# Altium PCB CHILD_BOARD_revA.PcbDoc (part 1 of 2)
Units mil, origin at the board's own origin, x right, y up, seen from the top; angles counter-clockwise.
Board outline 6000 x 4000 mil, 2 copper layers (Top Layer, Bottom Layer); 300 components, 212 nets, 880 pads, 8 vias.
Unrouted connection lines stored in the file: 627.
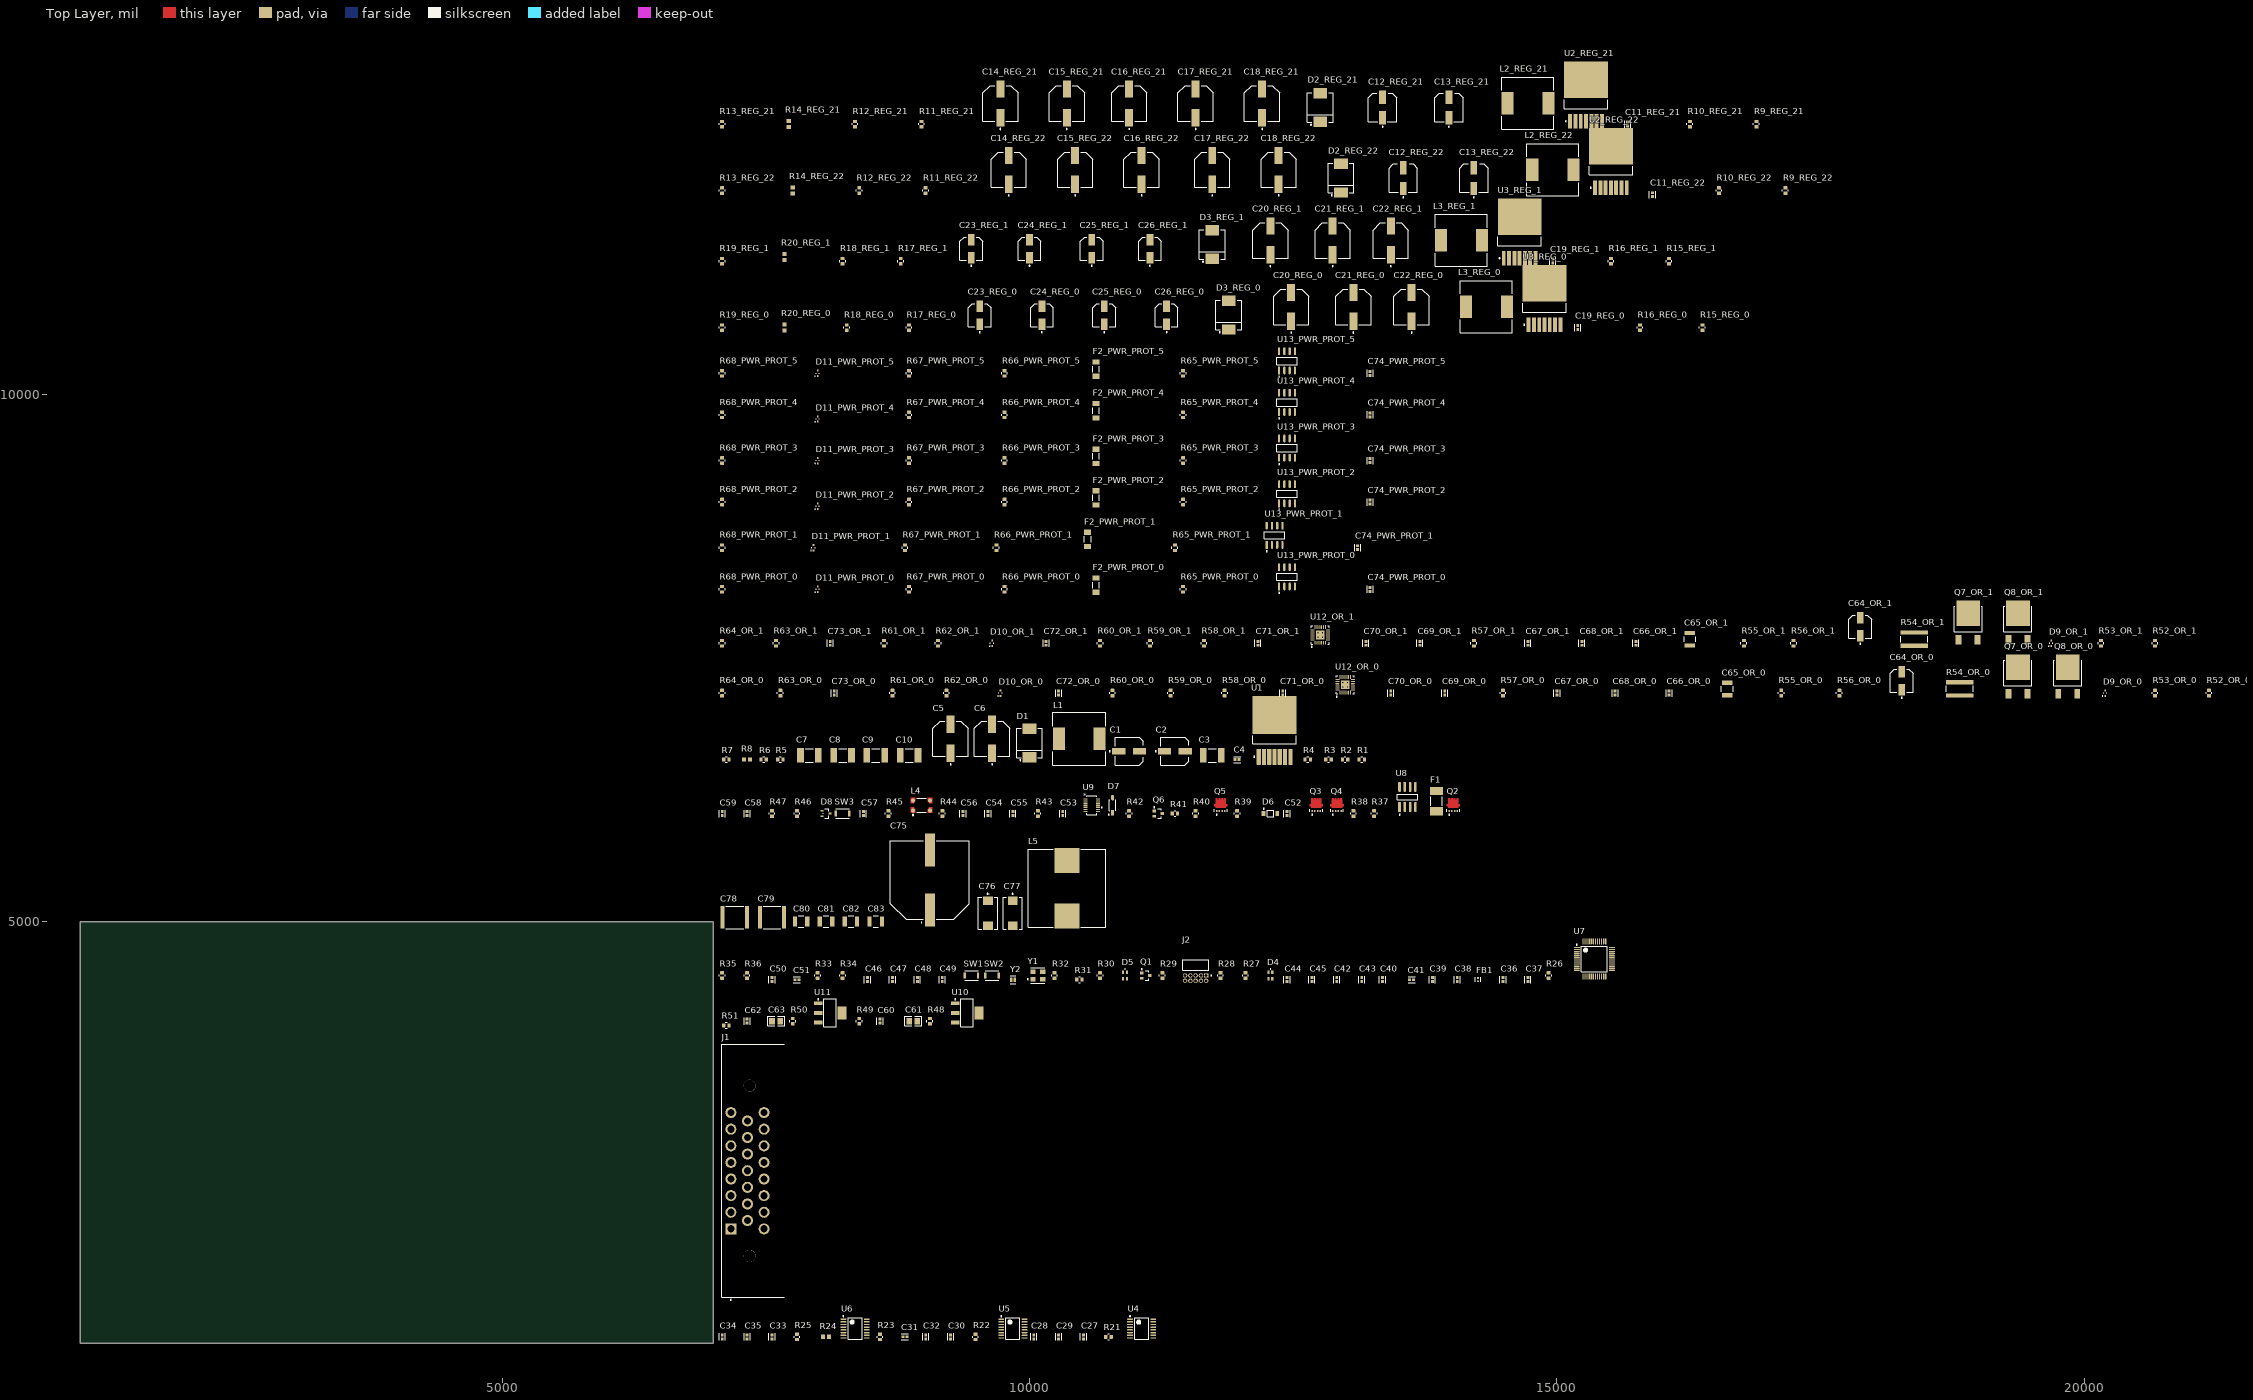
[diagram p0: Top Layer view]
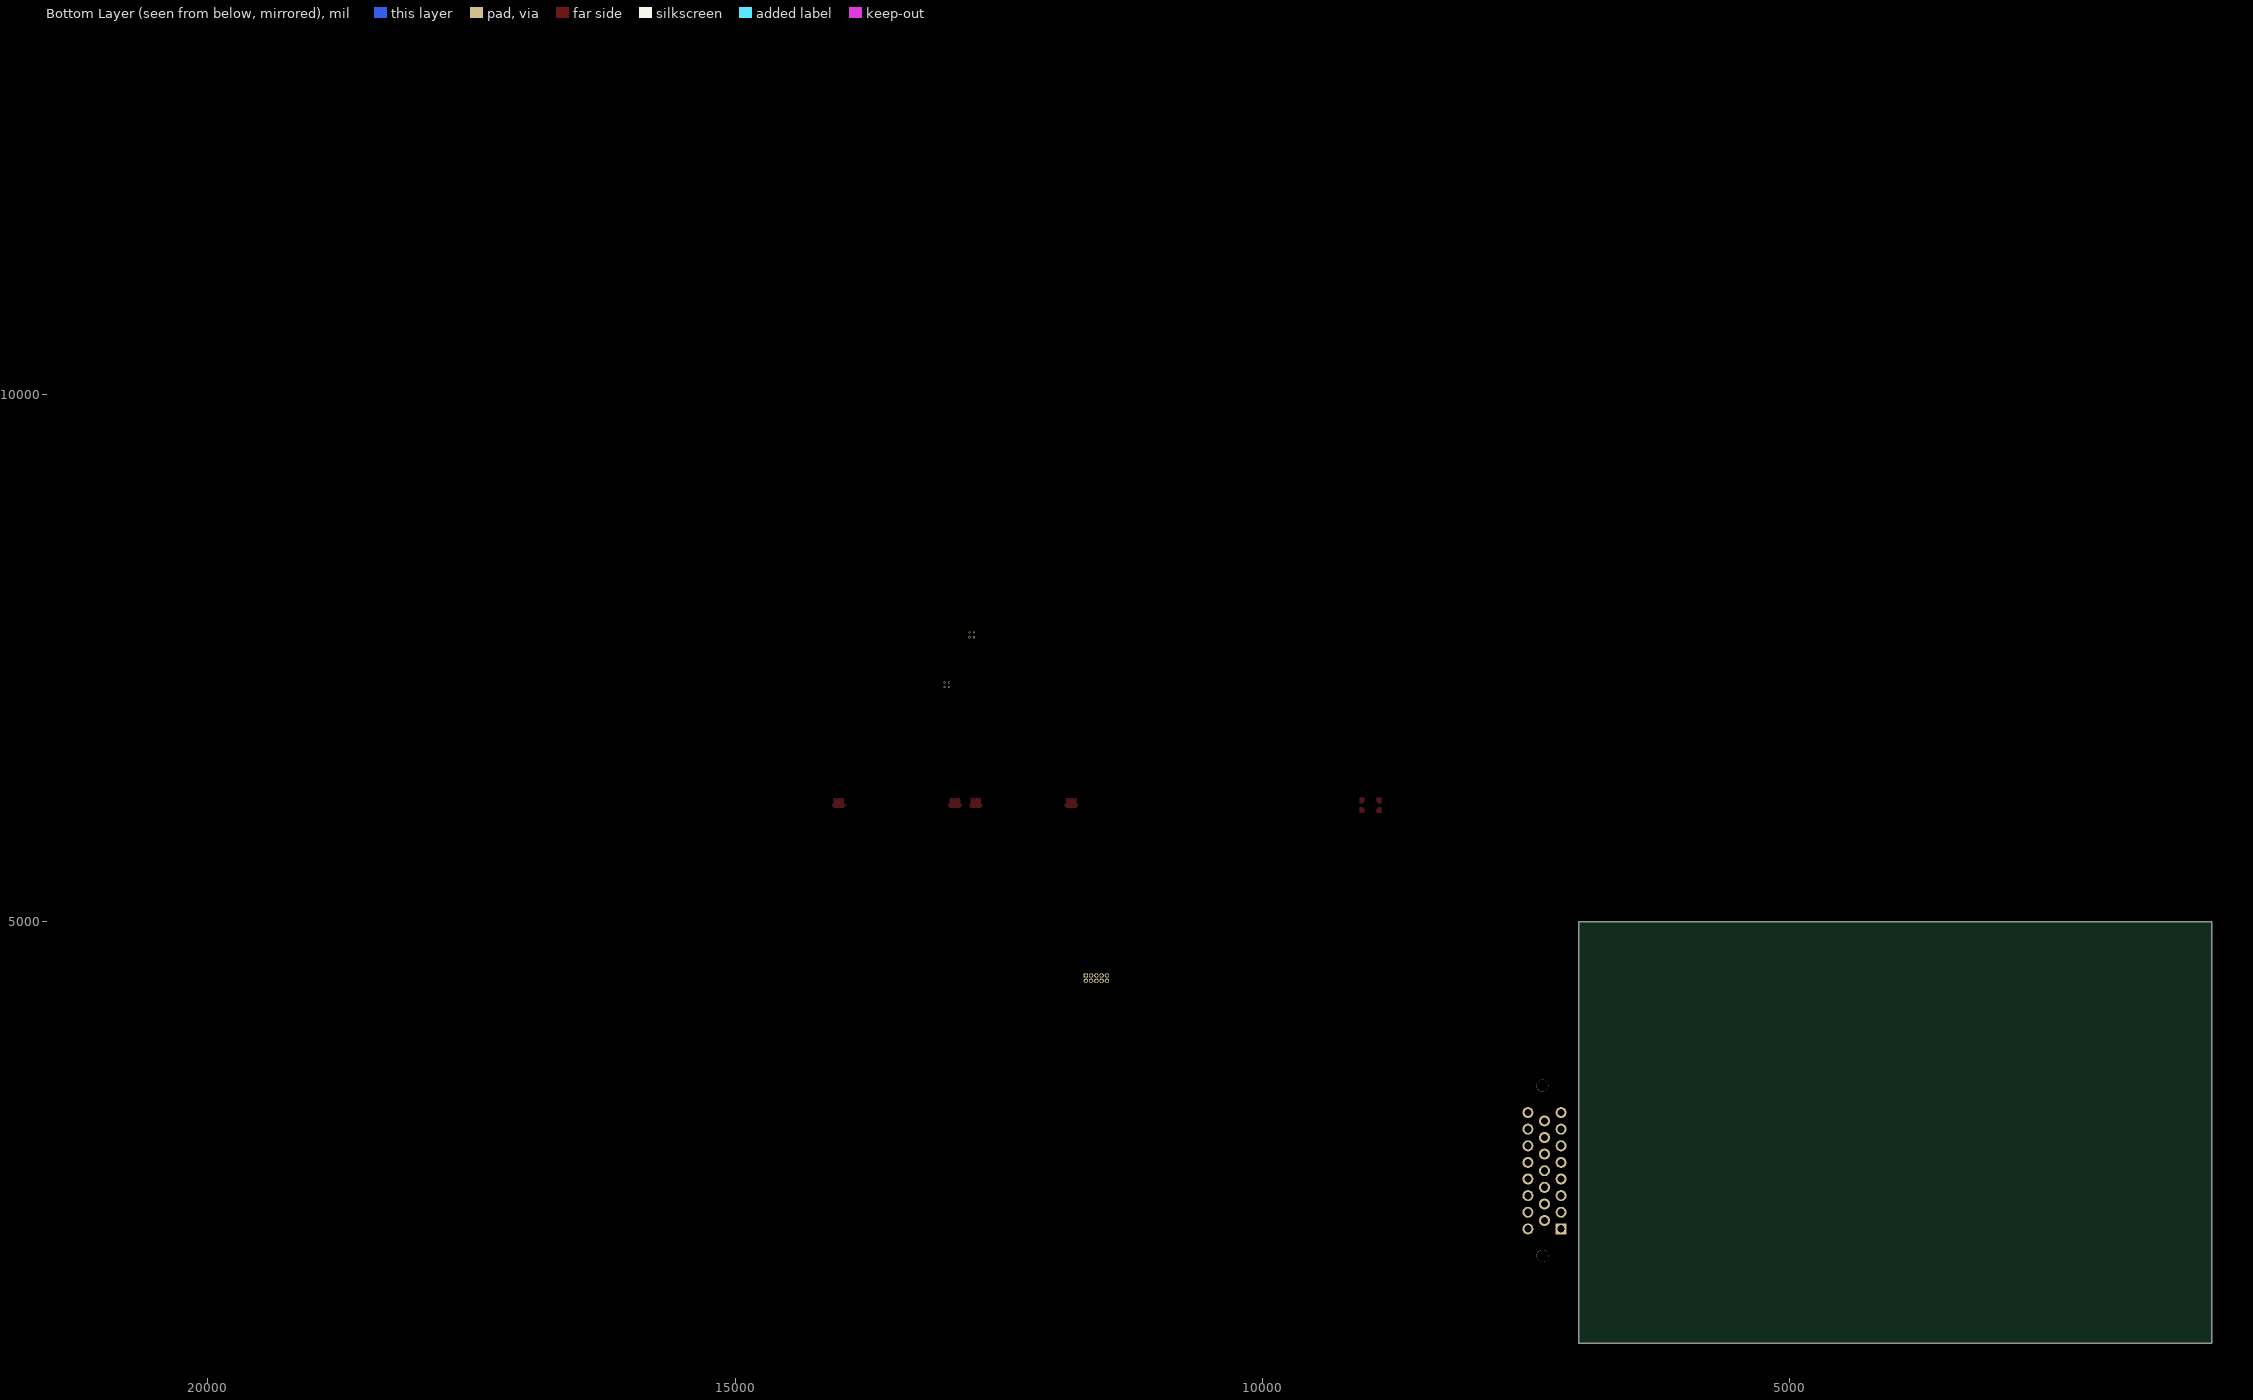
[diagram p1: Bottom Layer view, seen from below]

## Layer stack, top to bottom
Top Solder: solder mask 0.4, Solder Resist, Dk 3.5
Top Layer: signal copper 1.4
Dielectric 1: dielectric 12.6, FR-4, Dk 4.8
Bottom Layer: signal copper 1.4
Bottom Solder: solder mask 0.4, Solder Resist, Dk 3.5

## Board outline
1000,1000 7000,1000 7000,5000 1000,5000

## Design rules (kind name [scope] priority, off if disabled: settings)
Clearance [All] p1: gap=10 ignorepadtopadclearanceinfootprint=FALSE
DiffPairsRouting [All] p1: maxlimit=10 minlimit=10 mostfreqgap=10 toplayer_minwidth=15 toplayer_maxwidth=15 toplayer_prefwidth=15 bottomlayer_minwidth=15 bottomlayer_maxwidth=15 bottomlayer_prefwidth=15 maxuncoupledlength=500
PolygonConnect [All] p1: connectstyle=Relief reliefconductorwidth=10 reliefentries=4 polygonreliefangle="90 Angle" airgapwidth=10
RoutingVias [All] p1: holewidth=28 width=50 viastyle="Through Hole" minholewidth=28 minwidth=50 maxholewidth=28 maxwidth=50
SolderMaskExpansion [All] p1: expansion=4 istentingtop=FALSE
SupplyNets "Schematic Supply Nets_15" [InNet('5V_REG_FB_REG_1')] p1: voltage=0.000
SupplyNets "Schematic Supply Nets_14" [InNet('5V_REG_FB_REG_0')] p2: voltage=0.000
SupplyNets "Schematic Supply Nets_13" [InNet('3V3_INT')] p3: voltage=0.000
SupplyNets "Schematic Supply Nets_12" [InNet('INT_3V3')] p4: voltage=0.000
SupplyNets "Schematic Supply Nets_11" [InNet('3V3_AUX_FB_REG_21')] p5: voltage=0.000
SupplyNets "Schematic Supply Nets_10" [InNet('APM_VCC')] p6: voltage=0.000
SupplyNets "Schematic Supply Nets_9" [InNet('CAR_VCC')] p7: voltage=0.000
SupplyNets "Schematic Supply Nets_8" [InNet('JETSON_VCC')] p8: voltage=0.000
SupplyNets "Schematic Supply Nets_7" [InNet('INT_5V')] p9: voltage=0.000
SupplyNets "Schematic Supply Nets_6" [InNet('2V_AUX_OUT')] p10: voltage=0.000
SupplyNets "Schematic Supply Nets_5" [InNet('PWR_OUT')] p11: voltage=0.000
SupplyNets "Schematic Supply Nets_4" [InNet('3V3_AUX_FB_REG_22')] p12: voltage=0.000
SupplyNets "Schematic Supply Nets_3" [InNet('5V0_INT')] p13: voltage=0.000
SupplyNets "Schematic Supply Nets_2" [InNet('VCC')] p14: voltage=0.000
SupplyNets "Schematic Supply Nets_1" [InNet('GND')] p15: voltage=0.000
SupplyNets "Schematic Supply Nets" [InNet('3V3')] p16: voltage=0.000
Width [All] p1: maxlimit=10 minlimit=10 preferedwidth=10
29 further rules are at their usual default settings.

## Classes and differential pairs
channel class PWR_PROT_AND_VI_SENSE: PWR_PROT_0 PWR_PROT_1 PWR_PROT_2 PWR_PROT_3 PWR_PROT_4 PWR_PROT_5
channel class LM74910H_PINOUT: OR_0 OR_1
channel class 3V3_REG: REG_21 REG_22
component class REG_22: C11_REG_22 C12_REG_22 C13_REG_22 C14_REG_22 C15_REG_22 C16_REG_22 C17_REG_22 C18_REG_22 D2_REG_22 L2_REG_22 R9_REG_22 R10_REG_22 R11_REG_22 R12_REG_22 R13_REG_22 R14_REG_22 U2_REG_22
component class REG_21: C11_REG_21 C12_REG_21 C13_REG_21 C14_REG_21 C15_REG_21 C16_REG_21 C17_REG_21 C18_REG_21 D2_REG_21 L2_REG_21 R9_REG_21 R10_REG_21 R11_REG_21 R12_REG_21 R13_REG_21 R14_REG_21 U2_REG_21
component class PWR_PROT_5: C74_PWR_PROT_5 D11_PWR_PROT_5 F2_PWR_PROT_5 R65_PWR_PROT_5 R66_PWR_PROT_5 R67_PWR_PROT_5 R68_PWR_PROT_5 U13_PWR_PROT_5
component class PWR_PROT_4: C74_PWR_PROT_4 D11_PWR_PROT_4 F2_PWR_PROT_4 R65_PWR_PROT_4 R66_PWR_PROT_4 R67_PWR_PROT_4 R68_PWR_PROT_4 U13_PWR_PROT_4
component class PWR_PROT_3: C74_PWR_PROT_3 D11_PWR_PROT_3 F2_PWR_PROT_3 R65_PWR_PROT_3 R66_PWR_PROT_3 R67_PWR_PROT_3 R68_PWR_PROT_3 U13_PWR_PROT_3
component class PWR_PROT_2: C74_PWR_PROT_2 D11_PWR_PROT_2 F2_PWR_PROT_2 R65_PWR_PROT_2 R66_PWR_PROT_2 R67_PWR_PROT_2 R68_PWR_PROT_2 U13_PWR_PROT_2
component class PWR_PROT_1: C74_PWR_PROT_1 D11_PWR_PROT_1 F2_PWR_PROT_1 R65_PWR_PROT_1 R66_PWR_PROT_1 R67_PWR_PROT_1 R68_PWR_PROT_1 U13_PWR_PROT_1
component class PWR_PROT_0: C74_PWR_PROT_0 D11_PWR_PROT_0 F2_PWR_PROT_0 R65_PWR_PROT_0 R66_PWR_PROT_0 R67_PWR_PROT_0 R68_PWR_PROT_0 U13_PWR_PROT_0
component class PWR_FILTER_0: C75 C76 C77 C78 C79 C80 C81 C82 C83 L5
component class OR_1: C64_OR_1 C65_OR_1 C66_OR_1 C67_OR_1 C68_OR_1 C69_OR_1 C70_OR_1 C71_OR_1 C72_OR_1 C73_OR_1 D9_OR_1 D10_OR_1 Q7_OR_1 Q8_OR_1 R52_OR_1 R53_OR_1 R54_OR_1 R55_OR_1 R56_OR_1 R57_OR_1 R58_OR_1 R59_OR_1 R60_OR_1 R61_OR_1 R62_OR_1 R63_OR_1 R64_OR_1 U12_OR_1
component class OR_0: C64_OR_0 C65_OR_0 C66_OR_0 C67_OR_0 C68_OR_0 C69_OR_0 C70_OR_0 C71_OR_0 C72_OR_0 C73_OR_0 D9_OR_0 D10_OR_0 Q7_OR_0 Q8_OR_0 R52_OR_0 R53_OR_0 R54_OR_0 R55_OR_0 R56_OR_0 R57_OR_0 R58_OR_0 R59_OR_0 R60_OR_0 R61_OR_0 R62_OR_0 R63_OR_0 R64_OR_0 U12_OR_0
channel class 5V_REG: REG_0 REG_1
net class PWR: 2V_AUX_OUT 3V3_AUX_FB_REG_21 3V3_AUX_FB_REG_22 5V_REG_FB_REG_0 5V_REG_FB_REG_1 NetC4_2 NetC11_REG_21_2 NetC11_REG_22_2 NetC19_REG_0_2 NetC19_REG_1_2 PWR_IN PWR_IN_REG_0 PWR_IN_REG_1 PWR_IN_REG_21 PWR_IN_REG_22
net class 120DIFF: CAN_N CAN_P PRE_CAN_N PRE_CAN_P TERM_CAP
component class REG_3: C1 C2 C3 C4 C5 C6 C7 C8 C9 C10 D1 L1 R1 R2 R3 R4 R5 R6 R7 R8 U1
component class REG_1: C19_REG_1 C20_REG_1 C21_REG_1 C22_REG_1 C23_REG_1 C24_REG_1 C25_REG_1 C26_REG_1 D3_REG_1 L3_REG_1 R15_REG_1 R16_REG_1 R17_REG_1 R18_REG_1 R19_REG_1 R20_REG_1 U3_REG_1
component class REG_0: C19_REG_0 C20_REG_0 C21_REG_0 C22_REG_0 C23_REG_0 C24_REG_0 C25_REG_0 C26_REG_0 D3_REG_0 L3_REG_0 R15_REG_0 R16_REG_0 R17_REG_0 R18_REG_0 R19_REG_0 R20_REG_0 U3_REG_0
component class PWR_MGMT: C52 C53 C54 C55 C56 C57 C58 C59 D6 D7 D8 F1 L4 Q2 Q3 Q4 Q5 Q6 R37 R38 R39 R40 R41 R42 R43 R44 R45 R46 R47 SW3 U8 U9
component class INT_REG_0: C60 C61 C62 C63 R48 R49 R50 R51 U10 U11
component class MCU_0: C36 C37 C38 C39 C40 C41 C42 C43 C44 C45 C46 C47 C48 C49 C50 C51 D4 D5 FB1 J2 Q1 R26 R27 R28 R29 R30 R31 R32 R33 R34 R35 R36 SW1 SW2 U7 Y1 Y2
component class CHILD_BOARD: J1
component class ADC_0: C27 C28 C29 C30 C31 C32 C33 C34 C35 R21 R22 R23 R24 R25 U4 U5 U6
differential pair X: +X_P -X_N
differential pair X32: +X32_P -X32_N
differential pair PRE_CAN: +PRE_CAN_P -PRE_CAN_N

## Components (designator, comment, footprint, x,y, rotation, side; value= is the part's Value field where it differs from the comment)
C1 "EEHZA1V680XP" FP-EEH-D8-MFG 10944.89,6614.18 r0 top
C2 "EEHZA1V680XP" FP-EEH-D8-MFG 11377.96,6614.18 r0 top
C3 "CAP 470nF 50V 1812(4532)" CAPC1812(4532)125_M 11732.29,6574.81 r0 top value=470nF
C4 "10n" FP-0402-L_1_0_0_05-W_0_5-IPC_A 11968.51,6535.44 r0 top
C5 "16SVPC120M" FP-OS-CON-SMT-E7-MFG 9251.97,6732.29 r90 top
C6 "16SVPC120M" FP-OS-CON-SMT-E7-MFG 9645.67,6732.29 r90 top
C7 "CAP 470nF 50V 1812(4532)" CAPC1812(4532)125_M 7913.39,6574.81 r0 top value=470nF
C8 "CAP 470nF 50V 1812(4532)" CAPC1812(4532)125_M 8228.35,6574.81 r0 top value=470nF
C9 "CAP 470nF 50V 1812(4532)" CAPC1812(4532)125_M 8543.31,6574.81 r0 top value=470nF
C10 "CAP 470nF 50V 1812(4532)" CAPC1812(4532)125_M 8858.27,6574.81 r0 top value=470nF
C11_REG_21 "10n" FP-0402-L_1_0_0_05-W_0_5-IPC_A 15669.3,12559.06 r90 top (schematic designator C11)
C11_REG_22 "10n" FP-0402-L_1_0_0_05-W_0_5-IPC_A 15905.52,11889.77 r90 top (schematic designator C11)
C12_REG_21 "EEHZA1V680XP" FP-EEH-D8-MFG 13346.46,12716.54 r90 top (schematic designator C12)
C12_REG_22 "EEHZA1V680XP" FP-EEH-D8-MFG 13543.31,12047.25 r90 top (schematic designator C12)
C13_REG_21 "EEHZA1V680XP" FP-EEH-D8-MFG 13976.39,12716.54 r90 top (schematic designator C13)
C13_REG_22 "EEHZA1V680XP" FP-EEH-D8-MFG 14212.61,12047.25 r90 top (schematic designator C13)
C14_REG_21 "16SVPC120M" FP-OS-CON-SMT-E7-MFG 9724.41,12755.91 r90 top (schematic designator C14)
C14_REG_22 "16SVPC120M" FP-OS-CON-SMT-E7-MFG 9803.15,12125.99 r90 top (schematic designator C14)
C15_REG_21 "16SVPC120M" FP-OS-CON-SMT-E7-MFG 10354.34,12755.91 r90 top (schematic designator C15)
C15_REG_22 "16SVPC120M" FP-OS-CON-SMT-E7-MFG 10433.08,12125.99 r90 top (schematic designator C15)
C16_REG_21 "16SVPC120M" FP-OS-CON-SMT-E7-MFG 10944.89,12755.91 r90 top (schematic designator C16)
C16_REG_22 "16SVPC120M" FP-OS-CON-SMT-E7-MFG 11063,12125.99 r90 top (schematic designator C16)
C17_REG_21 "16SVPC120M" FP-OS-CON-SMT-E7-MFG 11574.81,12755.91 r90 top (schematic designator C17)
C17_REG_22 "16SVPC120M" FP-OS-CON-SMT-E7-MFG 11732.29,12125.99 r90 top (schematic designator C17)
C18_REG_21 "16SVPC120M" FP-OS-CON-SMT-E7-MFG 12204.73,12755.91 r90 top (schematic designator C18)
C18_REG_22 "16SVPC120M" FP-OS-CON-SMT-E7-MFG 12362.21,12125.99 r90 top (schematic designator C18)
C19_REG_0 "10n" FP-0402-L_1_0_0_05-W_0_5-IPC_A 15196.86,10629.93 r90 top (schematic designator C19)
C19_REG_1 "10n" FP-0402-L_1_0_0_05-W_0_5-IPC_A 14960.64,11259.85 r90 top (schematic designator C19)
C20_REG_0 "20SVP33M" FP-OS-CON-SMT-E7-MFG 12480.32,10826.78 r90 top (schematic designator C20)
C20_REG_1 "20SVP33M" FP-OS-CON-SMT-E7-MFG 12283.47,11456.7 r90 top (schematic designator C20)
C21_REG_0 "20SVP33M" FP-OS-CON-SMT-E7-MFG 13070.87,10826.78 r90 top (schematic designator C21)
C21_REG_1 "20SVP33M" FP-OS-CON-SMT-E7-MFG 12874.02,11456.7 r90 top (schematic designator C21)
C22_REG_0 "20SVP33M" FP-OS-CON-SMT-E7-MFG 13622.05,10826.78 r90 top (schematic designator C22)
C22_REG_1 "20SVP33M" FP-OS-CON-SMT-E7-MFG 13425.2,11456.7 r90 top (schematic designator C22)
C23_REG_0 "EEE-1AA101WR" FP-SC-MFG 9527.56,10748.04 r90 top (schematic designator C23)
C23_REG_1 "EEE-1AA101WR" FP-SC-MFG 9448.82,11377.96 r90 top (schematic designator C23)
C24_REG_0 "EEE-1AA101WR" FP-SC-MFG 10118.12,10748.04 r90 top (schematic designator C24)
C24_REG_1 "EEE-1AA101WR" FP-SC-MFG 10000.01,11377.96 r90 top (schematic designator C24)
C25_REG_0 "EEE-1AA101WR" FP-SC-MFG 10708.67,10748.04 r90 top (schematic designator C25)
C25_REG_1 "EEE-1AA101WR" FP-SC-MFG 10590.56,11377.96 r90 top (schematic designator C25)
C26_REG_0 "EEE-1AA101WR" FP-SC-MFG 11299.22,10748.04 r90 top (schematic designator C26)
C26_REG_1 "EEE-1AA101WR" FP-SC-MFG 11141.74,11377.96 r90 top (schematic designator C26)
C27 "100n" FP-0402-L_1_0_0_05-W_0_5-IPC_A 10511.82,1062.99 r90 top
C28 "100n" FP-0402-L_1_0_0_05-W_0_5-IPC_A 10039.38,1062.99 r90 top
C29 "100n" FP-0402-L_1_0_0_05-W_0_5-IPC_A 10275.6,1062.99 r90 top
C30 "100n" FP-0402-L_1_0_0_05-W_0_5-IPC_A 9251.97,1062.99 r90 top
C31 "100n" FP-0402-L_1_0_0_05-W_0_5-IPC_A 8818.9,1062.99 r0 top
C32 "100n" FP-0402-L_1_0_0_05-W_0_5-IPC_A 9015.75,1062.99 r90 top
C33 "100n" FP-0402-L_1_0_0_05-W_0_5-IPC_A 7559.06,1062.99 r90 top
C34 "100n" FP-0402-L_1_0_0_05-W_0_5-IPC_A 7086.62,1062.99 r90 top
C35 "100n" FP-0402-L_1_0_0_05-W_0_5-IPC_A 7322.84,1062.99 r90 top
C36 "4.7u" FP-0402-L_1_0_0_05-W_0_5-IPC_A 14488.2,4448.82 r90 top
C37 "100n" FP-0402-L_1_0_0_05-W_0_5-IPC_A 14724.42,4448.82 r90 top
C38 "100n" FP-0402-L_1_0_0_05-W_0_5-IPC_A 14055.13,4448.82 r90 top
C39 "100n" FP-0402-L_1_0_0_05-W_0_5-IPC_A 13818.91,4448.82 r90 top
C40 "1u" FP-0402-L_1_0_0_05-W_0_5-IPC_A 13346.46,4448.82 r90 top
C41 "100n" FP-0402-L_1_0_0_05-W_0_5-IPC_A 13622.05,4448.82 r0 top
C42 "1u" FP-0402-L_1_0_0_05-W_0_5-IPC_A 12913.39,4448.82 r90 top
C43 "100n" FP-0402-L_1_0_0_05-W_0_5-IPC_A 13149.61,4448.82 r90 top
C44 "1u" FP-0402-L_1_0_0_05-W_0_5-IPC_A 12440.95,4448.82 r90 top
C45 "100n" FP-0402-L_1_0_0_05-W_0_5-IPC_A 12677.17,4448.82 r90 top
C46 "6.8p" FP-0402-L_1_0_0_05-W_0_5-IPC_A 8464.57,4448.82 r90 top
C47 "6.8p" FP-0402-L_1_0_0_05-W_0_5-IPC_A 8700.79,4448.82 r90 top
C48 "18p" FP-0402-L_1_0_0_05-W_0_5-IPC_A 8937.01,4448.82 r90 top
C49 "18p" FP-0402-L_1_0_0_05-W_0_5-IPC_A 9173.23,4448.82 r90 top
C50 "100n" FP-0402-L_1_0_0_05-W_0_5-IPC_A 7559.06,4448.82 r90 top
C51 "100n" FP-0402-L_1_0_0_05-W_0_5-IPC_A 7795.28,4448.82 r0 top
C52 "100n" FP-0402-L_1_0_0_05-W_0_5-IPC_A 12440.95,6023.63 r90 top
C53 "100n" FP-0402-L_1_0_0_05-W_0_5-IPC_A 10314.97,6023.63 r90 top
C54 "100n" FP-0402-L_1_0_0_05-W_0_5-IPC_A 9606.3,6023.63 r90 top
C55 "100n" FP-0402-L_1_0_0_05-W_0_5-IPC_A 9842.52,6023.63 r90 top
C56 "6.6p" FP-0402-L_1_0_0_05-W_0_5-IPC_A 9370.08,6023.63 r90 top
C57 "100n" FP-0402-L_1_0_0_05-W_0_5-IPC_A 8425.2,6023.63 r90 top
C58 "6.6p" FP-0402-L_1_0_0_05-W_0_5-IPC_A 7322.84,6023.63 r90 top
C59 "100n" FP-0402-L_1_0_0_05-W_0_5-IPC_A 7086.62,6023.63 r90 top
C60 "100n" FP-0402-L_1_0_0_05-W_0_5-IPC_A 8582.68,4055.12 r90 top
C61 "10u/DNO" C0805A 8897.64,4055.12 r0 top
C62 "100n" FP-0402-L_1_0_0_05-W_0_5-IPC_A 7322.84,4055.12 r90 top
C63 "10u/DNO" C0805A 7598.43,4055.12 r0 top
C64_OR_0 "EEE-FK1H100UR" FP-FKC-MFG 18267.73,7283.47 r90 top (schematic designator C64)
C64_OR_1 "EEE-FK1H100UR" FP-FKC-MFG 17874.03,7795.28 r90 top (schematic designator C64)
C65_OR_0 "12103D106KAT2A" FP-1210-L_3_3_0_4-W_2_5_0-MFG 16614.18,7204.73 r90 top (schematic designator C65)
C65_OR_1 "12103D106KAT2A" FP-1210-L_3_3_0_4-W_2_5_0-MFG 16259.85,7677.17 r90 top (schematic designator C65)
C66_OR_0 "10n" FP-0402-L_1_0_0_05-W_0_5-IPC_A 16063,7165.36 r90 top (schematic designator C66)
C66_OR_1 "10n" FP-0402-L_1_0_0_05-W_0_5-IPC_A 15748.04,7637.8 r90 top (schematic designator C66)
C67_OR_0 "100n" FP-0402-L_1_0_0_05-W_0_5-IPC_A 15000.01,7165.36 r90 top (schematic designator C67)
C67_OR_1 "100n" FP-0402-L_1_0_0_05-W_0_5-IPC_A 14724.42,7637.8 r90 top (schematic designator C67)
C68_OR_0 "100n" FP-0402-L_1_0_0_05-W_0_5-IPC_A 15551.19,7165.36 r90 top (schematic designator C68)
C68_OR_1 "100n" FP-0402-L_1_0_0_05-W_0_5-IPC_A 15236.23,7637.8 r90 top (schematic designator C68)
C69_OR_0 "10n" FP-0402-L_1_0_0_05-W_0_5-IPC_A 13937.02,7165.36 r90 top (schematic designator C69)
C69_OR_1 "10n" FP-0402-L_1_0_0_05-W_0_5-IPC_A 13700.79,7637.8 r90 top (schematic designator C69)
C70_OR_0 "10n" FP-0402-L_1_0_0_05-W_0_5-IPC_A 13425.2,7165.36 r90 top (schematic designator C70)
C70_OR_1 "10n" FP-0402-L_1_0_0_05-W_0_5-IPC_A 13188.98,7637.8 r90 top (schematic designator C70)
C71_OR_0 "100n" FP-0402-L_1_0_0_05-W_0_5-IPC_A 12401.58,7165.36 r90 top (schematic designator C71)
C71_OR_1 "100n" FP-0402-L_1_0_0_05-W_0_5-IPC_A 12165.36,7637.8 r90 top (schematic designator C71)
C72_OR_0 "100n" FP-0402-L_1_0_0_05-W_0_5-IPC_A 10275.6,7165.36 r90 top (schematic designator C72)
C72_OR_1 "100n" FP-0402-L_1_0_0_05-W_0_5-IPC_A 10157.49,7637.8 r90 top (schematic designator C72)
C73_OR_0 "100n" FP-0402-L_1_0_0_05-W_0_5-IPC_A 8149.61,7165.36 r90 top (schematic designator C73)
C73_OR_1 "100n" FP-0402-L_1_0_0_05-W_0_5-IPC_A 8110.24,7637.8 r90 top (schematic designator C73)
C74_PWR_PROT_0 "100n" FP-0402-L_1_0_0_05-W_0_5-IPC_A 13228.35,8149.61 r90 top (schematic designator C74)
C74_PWR_PROT_1 "100n" FP-0402-L_1_0_0_05-W_0_5-IPC_A 13110.24,8543.31 r90 top (schematic designator C74)
C74_PWR_PROT_2 "100n" FP-0402-L_1_0_0_05-W_0_5-IPC_A 13228.35,8976.38 r90 top (schematic designator C74)
C74_PWR_PROT_3 "100n" FP-0402-L_1_0_0_05-W_0_5-IPC_A 13228.35,9370.08 r90 top (schematic designator C74)
C74_PWR_PROT_4 "100n" FP-0402-L_1_0_0_05-W_0_5-IPC_A 13228.35,9803.15 r90 top (schematic designator C74)
C74_PWR_PROT_5 "100n" FP-0402-L_1_0_0_05-W_0_5-IPC_A 13228.35,10196.86 r90 top (schematic designator C74)
C75 "MAL215099913E3" MAL215099913E3-Footprint-1 9055.12,5393.7 r90 top value=470µF
C76 "T491X107K025AT" FP-T491X107K025AT-MFG 9606.3,5078.74 r90 top
C77 "T491X107K025AT" FP-T491X107K025AT-MFG 9842.52,5078.74 r90 top
C78 "CGA9P3X7S2A156M250KB" FP-CGA9P-IPC_B 7204.73,5039.37 r0 top
C79 "CGA9P3X7S2A156M250KB" FP-CGA9P-IPC_B 7559.06,5039.37 r0 top
C80 "12103D106KAT2A" FP-1210-L_3_3_0_4-W_2_5_0-MFG 7834.65,5000 r0 top
C81 "12103D106KAT2A" FP-1210-L_3_3_0_4-W_2_5_0-MFG 8070.87,5000 r0 top
C82 "12103D106KAT2A" FP-1210-L_3_3_0_4-W_2_5_0-MFG 8307.09,5000 r0 top
C83 "12103D106KAT2A" FP-1210-L_3_3_0_4-W_2_5_0-MFG 8543.31,5000 r0 top
D1 "B540C-13-F" FP-SMC-MFG 10000.01,6692.92 r90 top value=300pF
D2_REG_21 "B540C-13-F" FP-SMC-MFG 12755.91,12716.54 r90 top value=300pF (schematic designator D2)
D2_REG_22 "B540C-13-F" FP-SMC-MFG 12952.76,12047.25 r90 top value=300pF (schematic designator D2)
D3_REG_0 "B540C-13-F" FP-SMC-MFG 11889.77,10748.04 r90 top value=300pF (schematic designator D3)
D3_REG_1 "B540C-13-F" FP-SMC-MFG 11732.29,11417.33 r90 top value=300pF (schematic designator D3)
D4 "150066RG54050" WL-SBCD_0606 12283.47,4488.19 r0 top
D5 "150066RG54050" WL-SBCD_0606 10905.52,4488.19 r0 top
D6 "MMSZ5242BT1G" ONSC-SOD-123-2-425-04_V 12283.47,6023.63 r0 top
D7 "1N4148W-TP" FP-SOD-123-IPC_A 10787.41,6102.37 r90 top
D8 "ESDCAN02-2BWY" FP-SOT323-3L-MFG 8070.87,6023.63 r0 top value=3pF
D9_OR_0 "DNP/MM5Z3V3T1G" ONSC-SOD-523-2-502-01_V 20196.86,7165.36 r90 top (schematic designator D9)
D9_OR_1 "DNP/MM5Z3V3T1G" ONSC-SOD-523-2-502-01_V 19685.05,7637.8 r90 top (schematic designator D9)
D10_OR_0 "DNP/MM5Z3V3T1G" ONSC-SOD-523-2-502-01_V 9724.41,7165.36 r90 top (schematic designator D10)
D10_OR_1 "DNP/MM5Z3V3T1G" ONSC-SOD-523-2-502-01_V 9645.67,7637.8 r90 top (schematic designator D10)
D11_PWR_PROT_0 "DNP/MM5Z3V3T1G" ONSC-SOD-523-2-502-01_V 7992.13,8149.61 r90 top (schematic designator D11)
D11_PWR_PROT_1 "DNP/MM5Z3V3T1G" ONSC-SOD-523-2-502-01_V 7952.76,8543.31 r90 top (schematic designator D11)
D11_PWR_PROT_2 "DNP/MM5Z3V3T1G" ONSC-SOD-523-2-502-01_V 7992.13,8937.01 r90 top (schematic designator D11)
D11_PWR_PROT_3 "DNP/MM5Z3V3T1G" ONSC-SOD-523-2-502-01_V 7992.13,9370.08 r90 top (schematic designator D11)
D11_PWR_PROT_4 "DNP/MM5Z3V3T1G" ONSC-SOD-523-2-502-01_V 7992.13,9763.78 r90 top (schematic designator D11)
D11_PWR_PROT_5 "DNP/MM5Z3V3T1G" ONSC-SOD-523-2-502-01_V 7992.13,10196.86 r90 top (schematic designator D11)
F1 "0679L9100-05" FP-0679L-MFG 13858.28,6141.74 r90 top value=0.0038Ω
F2_PWR_PROT_0 "SF-1206FP200-2" FP-SF-1206FP-MFG 10629.93,8188.98 r90 top (schematic designator F2)
F2_PWR_PROT_1 "SF-1206FP200-2" FP-SF-1206FP-MFG 10551.19,8622.05 r90 top (schematic designator F2)
F2_PWR_PROT_2 "SF-1206FP200-2" FP-SF-1206FP-MFG 10629.93,9015.75 r90 top (schematic designator F2)
F2_PWR_PROT_3 "SF-1206FP200-2" FP-SF-1206FP-MFG 10629.93,9409.45 r90 top (schematic designator F2)
F2_PWR_PROT_4 "SF-1206FP200-2" FP-SF-1206FP-MFG 10629.93,9842.52 r90 top (schematic designator F2)
F2_PWR_PROT_5 "SF-1206FP200-2" FP-SF-1206FP-MFG 10629.93,10236.23 r90 top (schematic designator F2)
FB1 "BLM15PX601SN1D" FP-BLM15-0_05-MFG 14251.98,4448.82 r90 top
J1 "776087-1" FP-776087-1-MFG 7834.65,2637.8 r90 top
J2 "FTSH-105-01-F-D-RA-K" FTSH-105-01-F-D-RA-K-Footprint-1 11574.81,4488.19 r0 top
L1 "SRR1260-150M" FP-SRR1260-MFG 10472.45,6732.29 r0 top
L2_REG_21 "74477110" WE-PD-L 14724.42,12755.91 r0 top (schematic designator L2)
L2_REG_22 "74477110" WE-PD-L 14960.64,12125.99 r0 top (schematic designator L2)
L3_REG_0 "74477110" WE-PD-L 14330.72,10826.78 r0 top (schematic designator L3)
L3_REG_1 "74477110" WE-PD-L 14094.5,11456.7 r0 top (schematic designator L3)
L4 "SRF4532-510Y" FP-SRF4532-MFG 8976.38,6102.37 r0 top
L5 "74435561100" WE-HCI_1890 10354.34,5314.96 r0 top
Q1 "DMG1013UW-7" DIOD-SOT323-3_V 11102.37,4488.19 r0 top
Q2 "SISH615ADN-T1-GE3" SISH615ADN-T1-GE3-Footprint-1 14015.76,6102.37 r0 top
Q3 "SISH615ADN-T1-GE3" SISH615ADN-T1-GE3-Footprint-1 12716.54,6102.37 r0 top
Q4 "SISH615ADN-T1-GE3" SISH615ADN-T1-GE3-Footprint-1 12913.39,6102.37 r0 top
Q5 "SISH615ADN-T1-GE3" SISH615ADN-T1-GE3-Footprint-1 11811.03,6102.37 r0 top
Q6 "BSS138W-7-F" DIOD-SOT323-3_V 11220.48,6023.63 r0 top
Q7_OR_0 "SUD80460E-GE3" FP-T16-0236-MFG 19370.09,7322.84 r0 top (schematic designator Q7)
Q7_OR_1 "SUD80460E-GE3" FP-T16-0236-MFG 18897.65,7834.65 r0 top (schematic designator Q7)
Q8_OR_0 "SUD80460E-GE3" FP-T16-0236-MFG 19842.53,7322.84 r0 top (schematic designator Q8)
Q8_OR_1 "SUD80460E-GE3" FP-T16-0236-MFG 19370.09,7834.65 r0 top (schematic designator Q8)
R1 "1k" R0603B 13149.61,6535.44 r0 top
R2 "100k/DNP" R0603B 12992.13,6535.44 r0 top value=100k
R3 "68.1k" R0603B 12834.65,6535.44 r0 top
R4 "100k" R0603B 12637.8,6535.44 r0 top
R5 "1k" R0603B 7637.8,6535.44 r0 top
R6 "1k" R0603B 7480.32,6535.44 r0 top
R7 "10k" R0603B 7125.99,6535.44 r0 top
R8 "ERT-J1VR103J" RESC1608X90X30ML15T20 7322.84,6535.44 r0 top
R9_REG_21 "10k" R0603B 16889.77,12559.06 r90 top (schematic designator R9)
R9_REG_22 "10k" R0603B 17165.36,11929.14 r90 top (schematic designator R9)
R10_REG_21 "100k" R0603B 16259.85,12559.06 r90 top (schematic designator R10)
R10_REG_22 "100k" R0603B 16535.44,11929.14 r90 top (schematic designator R10)
R11_REG_21 "1k" R0603B 8976.38,12559.06 r90 top (schematic designator R11)
R11_REG_22 "1k" R0603B 9015.75,11929.14 r90 top (schematic designator R11)
R12_REG_21 "1k" R0603B 8346.46,12559.06 r90 top (schematic designator R12)
R12_REG_22 "1k" R0603B 8385.83,11929.14 r90 top (schematic designator R12)
R13_REG_21 "10k" R0603B 7086.62,12559.06 r90 top (schematic designator R13)
R13_REG_22 "10k" R0603B 7086.62,11929.14 r90 top (schematic designator R13)
R14_REG_21 "ERT-J1VR103J" RESC1608X90X30ML15T20 7716.54,12559.06 r90 top (schematic designator R14)
R14_REG_22 "ERT-J1VR103J" RESC1608X90X30ML15T20 7755.91,11929.14 r90 top (schematic designator R14)
R15_REG_0 "100k" R0603B 16377.96,10629.93 r90 top (schematic designator R15)
R15_REG_1 "100k" R0603B 16063,11259.85 r90 top (schematic designator R15)
R16_REG_0 "100k" R0603B 15787.41,10629.93 r90 top (schematic designator R16)
R16_REG_1 "100k" R0603B 15511.82,11259.85 r90 top (schematic designator R16)
R17_REG_0 "1k" R0603B 8858.27,10629.93 r90 top (schematic designator R17)
R17_REG_1 "1k" R0603B 8779.53,11259.85 r90 top (schematic designator R17)
R18_REG_0 "1k" R0603B 8267.72,10629.93 r90 top (schematic designator R18)
R18_REG_1 "1k" R0603B 8228.35,11259.85 r90 top (schematic designator R18)
R19_REG_0 "10k" R0603B 7086.62,10629.93 r90 top (schematic designator R19)
R19_REG_1 "10k" R0603B 7086.62,11259.85 r90 top (schematic designator R19)
R20_REG_0 "ERT-J1VR103J" RESC1608X90X30ML15T20 7677.17,10629.93 r90 top (schematic designator R20)
R20_REG_1 "ERT-J1VR103J" RESC1608X90X30ML15T20 7677.17,11299.22 r90 top (schematic designator R20)
R21 "56" R0603B 10748.04,1062.99 r0 top
R22 "56" R0603B 9488.19,1062.99 r90 top
R23 "1k" R0603B 8582.68,1062.99 r90 top
R24 "ERT-J1VR103J" RESC1608X90X30ML15T20 8070.87,1062.99 r0 top
R25 "56" R0603B 7795.28,1062.99 r90 top
R26 "10k" R0603B 14921.27,4488.19 r90 top
R27 "330" R0603B 12047.25,4488.19 r90 top
R28 "1k" R0603B 11811.03,4488.19 r90 top
R29 "1k" R0603B 11259.85,4488.19 r90 top
R30 "100k" R0603B 10669.3,4488.19 r90 top
R31 "330" R0603B 10472.45,4448.82 r0 top
R32 "330" R0603B 10236.23,4488.19 r90 top
R33 "330" R0603B 7992.13,4488.19 r90 top
R34 "330" R0603B 8228.35,4488.19 r90 top
R35 "10k" R0603B 7086.62,4488.19 r90 top
R36 "10k" R0603B 7322.84,4488.19 r90 top
R37 "1k" R0603B 13267.72,6023.63 r90 top
R38 "100k" R0603B 13070.87,6023.63 r90 top
R39 "100k" R0603B 11968.51,6023.63 r90 top
R40 "100k" R0603B 11574.81,6023.63 r90 top
R41 "1k" R0603B 11377.96,6023.63 r0 top
R42 "100k" R0603B 10944.89,6023.63 r90 top
R43 "100k" R0603B 10078.75,6023.63 r90 top
R44 "1k" R0603B 9173.23,6023.63 r90 top
R45 "60.4" R0603B 8661.42,6023.63 r90 top
R46 "120" R0603B 7795.28,6023.63 r90 top
R47 "60.4" R0603B 7559.06,6023.63 r90 top
R48 "100k" R0603B 9055.12,4055.12 r90 top
R49 "100k" R0603B 8385.83,4055.12 r90 top
R50 "10k" R0603B 7755.91,4055.12 r90 top
R51 "100k" R0603B 7125.99,4015.75 r0 top
R52_OR_0 "100k" R0603B 21181.11,7165.36 r90 top (schematic designator R52)
R52_OR_1 "100k" R0603B 20669.3,7637.8 r90 top (schematic designator R52)
R53_OR_0 "24k" R0603B 20669.3,7165.36 r90 top (schematic designator R53)
R53_OR_1 "24k" R0603B 20157.49,7637.8 r90 top (schematic designator R53)
R54_OR_0 "KRL6432E-M-R003-F-T1" FP-KRL6432E-MFG 18818.91,7204.73 r90 top (schematic designator R54)
R54_OR_1 "KRL6432E-M-R003-F-T1" FP-KRL6432E-MFG 18385.84,7677.17 r90 top (schematic designator R54)
R55_OR_0 "DNP" R0603B 17125.99,7165.36 r90 top (schematic designator R55)
R55_OR_1 "DNP" R0603B 16771.66,7637.8 r90 top (schematic designator R55)
R56_OR_0 "49.9" R0603B 17677.17,7165.36 r90 top (schematic designator R56)
R56_OR_1 "49.9" R0603B 17244.1,7637.8 r90 top (schematic designator R56)
R57_OR_0 "0" R0603B 14488.2,7165.36 r90 top (schematic designator R57)
R57_OR_1 "0" R0603B 14212.61,7637.8 r90 top (schematic designator R57)
R58_OR_0 "100k" R0603B 11850.4,7165.36 r90 top (schematic designator R58)
R58_OR_1 "100k" R0603B 11653.55,7637.8 r90 top (schematic designator R58)
R59_OR_0 "100k" R0603B 11338.59,7165.36 r90 top (schematic designator R59)
R59_OR_1 "100k" R0603B 11141.74,7637.8 r90 top (schematic designator R59)
R60_OR_0 "11.5k" R0603B 10787.41,7165.36 r90 top (schematic designator R60)
R60_OR_1 "11.5k" R0603B 10669.3,7637.8 r90 top (schematic designator R60)
R61_OR_0 "5.1k" R0603B 8700.79,7165.36 r90 top (schematic designator R61)
R61_OR_1 "5.1k" R0603B 8622.05,7637.8 r90 top (schematic designator R61)
R62_OR_0 "8.2k" R0603B 9212.6,7165.36 r90 top (schematic designator R62)
R62_OR_1 "8.2k" R0603B 9133.86,7637.8 r90 top (schematic designator R62)
R63_OR_0 "100k" R0603B 7637.8,7165.36 r90 top (schematic designator R63)
R63_OR_1 "100k" R0603B 7598.43,7637.8 r90 top (schematic designator R63)
R64_OR_0 "3.6k" R0603B 7086.62,7165.36 r90 top (schematic designator R64)
R64_OR_1 "3.6k" R0603B 7086.62,7637.8 r90 top (schematic designator R64)
R65_PWR_PROT_0 "1k" R0603B 11456.7,8149.61 r90 top (schematic designator R65)
R65_PWR_PROT_1 "1k" R0603B 11377.96,8543.31 r90 top (schematic designator R65)
R65_PWR_PROT_2 "1k" R0603B 11456.7,8976.38 r90 top (schematic designator R65)
R65_PWR_PROT_3 "1k" R0603B 11456.7,9370.08 r90 top (schematic designator R65)
R65_PWR_PROT_4 "1k" R0603B 11456.7,9803.15 r90 top (schematic designator R65)
R65_PWR_PROT_5 "1k" R0603B 11456.7,10196.86 r90 top (schematic designator R65)
R66_PWR_PROT_0 "100k" R0603B 9763.78,8149.61 r90 top (schematic designator R66)
R66_PWR_PROT_1 "100k" R0603B 9685.04,8543.31 r90 top (schematic designator R66)
R66_PWR_PROT_2 "100k" R0603B 9763.78,8976.38 r90 top (schematic designator R66)
R66_PWR_PROT_3 "100k" R0603B 9763.78,9370.08 r90 top (schematic designator R66)
R66_PWR_PROT_4 "100k" R0603B 9763.78,9803.15 r90 top (schematic designator R66)
R66_PWR_PROT_5 "100k" R0603B 9763.78,10196.86 r90 top (schematic designator R66)
R67_PWR_PROT_0 "100k" R0603B 8858.27,8149.61 r90 top (schematic designator R67)
R67_PWR_PROT_1 "100k" R0603B 8818.9,8543.31 r90 top (schematic designator R67)
R67_PWR_PROT_2 "100k" R0603B 8858.27,8976.38 r90 top (schematic designator R67)
R67_PWR_PROT_3 "100k" R0603B 8858.27,9370.08 r90 top (schematic designator R67)
R67_PWR_PROT_4 "100k" R0603B 8858.27,9803.15 r90 top (schematic designator R67)
R67_PWR_PROT_5 "100k" R0603B 8858.27,10196.86 r90 top (schematic designator R67)
R68_PWR_PROT_0 "24k" R0603B 7086.62,8149.61 r90 top (schematic designator R68)
R68_PWR_PROT_1 "24k" R0603B 7086.62,8543.31 r90 top (schematic designator R68)
R68_PWR_PROT_2 "24k" R0603B 7086.62,8976.38 r90 top (schematic designator R68)
R68_PWR_PROT_3 "24k" R0603B 7086.62,9370.08 r90 top (schematic designator R68)
R68_PWR_PROT_4 "24k" R0603B 7086.62,9803.15 r90 top (schematic designator R68)
R68_PWR_PROT_5 "24k" R0603B 7086.62,10196.86 r90 top (schematic designator R68)
SW1 "KXT331LHS" FP-KXT331LHS-MFG 9448.82,4488.19 r0 top
SW2 "KXT331LHS" FP-KXT331LHS-MFG 9645.67,4488.19 r0 top
SW3 "KXT331LHS" FP-KXT331LHS-MFG 8228.35,6023.63 r0 top
U1 "LM2677S-ADJ" KTW0007B_M 12322.84,6811.03 r90 top
U2_REG_21 "LM2678S-3.3/NOPB" KTW0007B_N 15275.6,12834.65 r90 top (schematic designator U2)
U2_REG_22 "LM2678S-3.3/NOPB" KTW0007B_N 15511.82,12204.73 r90 top (schematic designator U2)
U3_REG_0 "LM2678S-5.0" KTW0007B_N 14881.9,10905.52 r90 top (schematic designator U3)
U3_REG_1 "LM2678S-5.0" KTW0007B_N 14645.68,11535.44 r90 top (schematic designator U3)
U4 "ADC088S022CIMT/NOPB" MTC16_L 11063,1141.73 r0 top
U5 "ADC088S022CIMT/NOPB" MTC16_L 9842.52,1141.73 r0 top
U6 "ADC088S022CIMT/NOPB" MTC16_L 8346.46,1141.73 r0 top
U7 "STM32G473CET6" TSQFP50P900X900X160-48N 15354.34,4645.67 r0 top
U8 "ACS711KLCTR-25AB-T" FP-LC-8-IPC_A 13582.68,6181.11 r90 top
U9 "TCAN1146DYYRQ1" TCAN1146DYYRQ1-Footprint-1 10590.56,6102.37 r0 top
U10 "LD1117S50TR" SOT-223_L 9409.45,4133.86 r0 top
U11 "LD1117S33TR" SOT-223_L 8110.24,4133.86 r0 top
U12_OR_0 "LM74910HQRGERQ1" QFN50P400X400X100_HS-25N 12992.13,7244.1 r90 top (schematic designator U12)
U12_OR_1 "LM74910HQRGERQ1" QFN50P400X400X100_HS-25N 12755.91,7716.54 r90 top (schematic designator U12)
U13_PWR_PROT_0 "ACS711KLCTR-12AB-T" FP-LC-8-IPC_C 12440.95,8267.72 r90 top (schematic designator U13)
U13_PWR_PROT_1 "ACS711KLCTR-12AB-T" FP-LC-8-IPC_C 12322.84,8661.42 r90 top (schematic designator U13)
U13_PWR_PROT_2 "ACS711KLCTR-12AB-T" FP-LC-8-IPC_C 12440.95,9055.12 r90 top (schematic designator U13)
U13_PWR_PROT_3 "ACS711KLCTR-12AB-T" FP-LC-8-IPC_C 12440.95,9488.19 r90 top (schematic designator U13)
U13_PWR_PROT_4 "ACS711KLCTR-12AB-T" FP-LC-8-IPC_C 12440.95,9921.27 r90 top (schematic designator U13)
U13_PWR_PROT_5 "ACS711KLCTR-12AB-T" FP-LC-8-IPC_C 12440.95,10314.97 r90 top (schematic designator U13)
Y1 "ABM8-48.000MHZ-B2-T" FP-ABM8-MFG 10078.75,4488.19 r0 top
Y2 "ECS-.327-12.5-1210-TR" FP-ECX-1210-MFG 9842.52,4448.82 r0 top

## Footprints (in the part's own frame and the unit in brackets; to place one, negate y for a bottom-side part, rotate by r counter-clockwise, add the part's x,y. Pads: shape width x height; smd on the part's side, far side on the other; paste and mask are expansions set on the pad)
C0805A [mm] "0805 Capacitor"
  rect 1.4x1.55 smd: 1(-0.975,0) 2(0.975,0)
  silkscreen extent -2.03,-1.14 2.03,1.14, body extent -1.07,-0.7 1.07,0.7, height 0.65
CAPC1812(4532)125_M [mm] "Chip Capacitor, Body 4.5x3.2mm, Height 1.25mm, IPC Low Density"
  rect 1.6x3.5 smd: 1(-2.15,0) 2(2.15,0)
  silkscreen extent -0.95,-1.65 0.95,1.65, body extent -2.4,-1.7 2.4,1.7, height 1.25
DIOD-SOT323-3_V [mm] "SOT323, 3-Leads, Body 2.2x1.35mm, Pitch 0.65mm"
  rect 0.9x0.7 smd: 1(-0.95,0.65) 2(-0.95,-0.65) 3(0.95,0)
  silkscreen extent -1.07,-1.1 0.67,1.67, body extent -1.1,-1.1 1.1,1.1, height 1.07
FP-0402-L_1_0_0_05-W_0_5-IPC_A [mil]
  rect 28.16x26.48 smd paste+0 mask+0: 1(-18.84,0) 2(18.84,0)
  silkscreen extent -33,-29 33,29, body extent -41,-21 41,21, height 10
FP-0679L-MFG [mm]
  rect 1.96x3.15 smd paste+0 mask+0: 1(-2.455,0) 2(2.455,0)
  silkscreen extent -1.1,-1.4 1.1,1.4, body extent -3.53,-1.68 3.53,1.68, height 0.25
FP-1210-L_3_3_0_4-W_2_5_0-MFG [mm]
  rect 1x2.5 smd paste+0 mask+0: 1(-1.5,0) 2(1.5,0)
  silkscreen extent -0.62,-1.4 0.62,1.4, body extent -2.1,-1.5 2.1,1.5, height 0.25
FP-776087-1-MFG [mm]
  rect 2.65x2.65 hole 1.75 paste-2539.97 mask+0: 1(-14,16.9)
  round 2.65 hole 1.75 paste-2539.97 mask+0: 2(-10,16.9) 3(-6,16.9) 4(-2,16.9) 5(2,16.9) 6(6,16.9) 7(10,16.9) 8(14,16.9) 9(-12,12.9) 10(-8,12.9) 11(-4,12.9) 12(0,12.9) 13(4,12.9) 14(8,12.9) 15(12,12.9) 16(-14,8.9) 17(-10,8.9) 18(-6,8.9) 19(-2,8.9) 20(2,8.9) 21(6,8.9) 22(10,8.9) 23(14,8.9)
  round 2.85 hole 2.85 unplated paste-2539.97 mask+0: ""(-20.5,12.4) ""(20.5,12.4)
  silkscreen extent -31.22,4 30.5,19.15, body extent -30.6,-19.25 30.6,19.25, height 0.25
FP-ABM8-MFG [mm]
  rect 1.3x1.05 smd paste+0 mask+0: 1(-1.15,-0.875) 2(1.15,-0.875) 3(1.15,0.875) 4(-1.15,0.875)
  silkscreen extent -2.5,-1.88 1.7,1.88, body extent -1.9,-1.5 1.9,1.5, height 0.25
FP-BLM15-0_05-MFG [mm]
  rect 0.4x0.5 smd paste+0 mask+0: 1(-0.4,0) 2(0.4,0)
  silkscreen extent -0.53,-0.63 0.52,0.63, body extent -0.7,-0.38 0.7,0.38, height 0.25
FP-CGA9P-IPC_B [mm]
  rect 0.953x5.403 smd paste+0 mask+0: 1(-2.925,0) 2(2.925,0)
  silkscreen extent -2.15,-2.7 2.15,2.7, body extent -3.65,-2.95 3.65,2.95, height 0.25
FP-ECX-1210-MFG [mm]
  rect 0.575x1.14 smd paste+0 mask+0: 1(-0.413,0) 2(0.413,0)
  silkscreen extent -0.65,-0.95 0.65,0.95, body extent -0.8,-0.67 0.8,0.67, height 0.25
FP-EEH-D8-MFG [mm]
  rect 3.2x1.6 smd paste+0 mask+0: 1(-2.5,0) 2(2.5,0)
  silkscreen extent -4.77,-3.4 3.4,3.4, body extent -4.35,-3.65 4.35,3.65, height 0.25
FP-FKC-MFG [mm]
  rect 2.8x1.6 smd paste+0 mask+0: 1(-2.15,0) 2(2.15,0)
  silkscreen extent -4.22,-2.75 2.75,2.75, body extent -3.8,-3 3.8,3, height 0.25
FP-KRL6432E-MFG [mm]
  rect 1x6.6 smd paste+0 mask+0: 1(-1.6,0) 2(1.6,0)
  silkscreen extent -0.72,-3.25 0.72,3.25, body extent -2.2,-3.4 2.2,3.4, height 0.25
FP-KXT331LHS-MFG [mm]
  rect 0.55x1.5 smd paste+0 mask+0: 1(-1.625,0) 2(1.625,0)
  silkscreen extent -1.65,-1.15 1.65,1.15, body extent -2,-1.25 2,1.25, height 0.25
FP-LC-8-IPC_A [mil]
  rect 97.4x24.49 smd paste+0 mask+0: 1(-95.12,75)
  rrect100% 97.4x24.49 smd paste+0 mask+0: 2(-95.12,25) 3(-95.12,-25) 4(-95.12,-75) 5(95.12,-75) 6(95.12,-25) 7(95.12,25) 8(95.12,75)
  silkscreen extent -172,-96 27,96, body extent -164,-116 164,116, height 10
FP-LC-8-IPC_C [mil]
  rect 73.78x21.34 smd paste+0 mask+0: 1(-91.18,75)
  rrect100% 73.78x21.34 smd paste+0 mask+0: 2(-91.18,25) 3(-91.18,-25) 4(-91.18,-75) 5(91.18,-75) 6(91.18,-25) 7(91.18,25) 8(91.18,75)
  silkscreen extent -156,-96 35,96, body extent -132,-100 132,100, height 10
FP-OS-CON-SMT-E7-MFG [mm]
  rect 4.15x1.9 smd paste+0 mask+0: 1(-3.475,0) 2(3.475,0)
  silkscreen extent -6.3,-4.25 4.25,4.25, body extent -5.8,-4.5 5.8,4.5, height 0.25
FP-SC-MFG [mm]
  rect 2.8x1.6 smd paste+0 mask+0: 1(-2.15,0) 2(2.15,0)
  silkscreen extent -4.22,-2.75 2.75,2.75, body extent -3.8,-3 3.8,3, height 0.25
FP-SF-1206FP-MFG [mm]
  rect 1.25x1.65 smd paste+0 mask+0: 1(-1.725,0) 2(1.725,0)
  silkscreen extent -0.72,-0.82 0.72,0.82, body extent -2.45,-0.92 2.45,0.92, height 0.25
FP-SMC-MFG [mm]
  rect 2.5x3.3 smd paste+0 mask+0: 1(-3.45,0) 2(3.45,0)
  silkscreen extent -4.25,-3.11 3.55,3.11, body extent -4.8,-3.21 4.8,3.21, height 0.25
FP-SOD-123-IPC_A [mm]
  rect 1.308x0.762 smd paste+0 mask+0: 1(-1.825,0)
  rrect100% 1.308x0.762 smd paste+0 mask+0: 2(1.825,0)
  silkscreen extent -2.39,-0.8 1.35,1.01, body extent -2.98,-1.3 2.98,1.3, height 0.25
FP-SOT323-3L-MFG [mm]
  rect 0.7x0.42 smd paste+0 mask+0: 1(-1,0.65) 2(-1,-0.65) 3(1,0)
  silkscreen extent -0.67,-1.1 0.67,1.1, body extent -1.45,-1.2 1.45,1.2, height 0.25
FP-SRF4532-MFG [mm]
  round 0.99 smd paste+0 mask+0: 1(-2.05,-1.25) 2(2.05,-1.25)
  round 0.97 smd paste+0 mask+0: 3(2.05,1.125) 4(-2.05,1.125)
  Top Layer region: -2.6,0.45 -2.6,1.8 -1.5,1.8 -1.5,0.95 -1.9,0.45
  Top Layer region: 1.5,1.8 2.6,1.8 2.6,0.45 1.9,0.45 1.5,0.95
  Top Layer region: 1.5,-1.8 1.5,-0.95 1.9,-0.45 2.6,-0.45 2.6,-1.8
  Top Layer region: -2.6,-1.8 -2.6,-0.45 -1.9,-0.45 -1.5,-0.95 -1.5,-1.8
  silkscreen extent -2.17,-2.47 1.12,1.7, body extent -2.7,-1.9 2.7,1.9, height 0.25
FP-SRR1260-MFG [mm]
  rect 2.9x5.4 smd paste+0 mask+0: 1(-4.85,0) 2(4.85,0)
  silkscreen extent -6.4,-6.4 6.4,6.4, body extent -6.5,-6.5 6.5,6.5, height 0.25
FP-T16-0236-MFG [mil]
  rect 55x90 smd paste+0 mask+0: 1(-90,-165) 3(90,-165)
  rect 224.02x243.31 smd paste+0 mask+0: 4(0,88.35)
  silkscreen extent -132,-90 132,155, body extent -136,-214 136,214, height 10
FP-T491X107K025AT-MFG [mm]
  rect 1.99x2.33 smd paste+0 mask+0: 1(-3.01,0) 2(3.01,0)
  silkscreen extent -3.8,-2.3 4.92,2.3, body extent -4.11,-2.4 4.11,2.4, height 0.25
FTSH-105-01-F-D-RA-K-Footprint-1 [mm]
  rect 1.06x1.06 hole 0.71: 01(2.54,0)
  round 1.06 hole 0.71: 02(2.54,-1.27) 03(1.27,0) 04(1.27,-1.27) 05(0,0) 06(0,-1.27) 07(-1.27,0) 08(-1.27,-1.27) 09(-2.54,0) 10(-2.54,-1.27)
  silkscreen extent -3.14,-0.1 3.88,3.78, body extent -3.14,-1.54 3.14,6.92, height 5.04
KTW0007B_M [mm] "DPAK, 7-Leads, Body 9.4x10.4mm, Pitch 1.27mm, IPC Low Density"
  rrect10% 3.8x1 smd: 1(-6.35,3.81) 2(-6.35,2.54) 3(-6.35,1.27) 4(-6.35,0) 5(-6.35,-1.27) 6(-6.35,-2.54) 7(-6.35,-3.81)
  rrect1% 9.1x10.55 smd: 8(3.7,0)
  silkscreen extent -6.47,-5.2 -1.25,5.2, body extent -3.2,-5.2 6.2,5.2, height 4.65
KTW0007B_N [mm] "DPAK, 7-Leads, Body 9.4x10.4mm, Pitch 1.27mm, IPC Medium Density"
  rrect11% 3.5x0.95 smd: 1(-6.3,3.81) 2(-6.3,2.54) 3(-6.3,1.27) 4(-6.3,0) 5(-6.3,-1.27) 6(-6.3,-2.54) 7(-6.3,-3.81)
  rrect1% 8.8x10.5 smd: 8(3.65,0)
  silkscreen extent -6.42,-5.2 -1.15,5.2, body extent -3.25,-5.2 6.15,5.2, height 4.65
MAL215099913E3-Footprint-1 [mm]
  rect 8.06x2.41 smd: 1(-7.225,0) 2(7.225,0)
  silkscreen extent -10.35,-9.5 9.5,9.5, body extent -10.5,-9.5 10.5,9.5, height 22
MTC16_L [mm] "TSOP, 16-Leads, Body 5x4.4mm, Pitch 0.65mm, IPC High Density"
  oval 1.4x0.35 smd: 1(-2.8,2.275) 2(-2.8,1.625) 3(-2.8,0.975) 4(-2.8,0.325) 5(-2.8,-0.325) 6(-2.8,-0.975) 7(-2.8,-1.625) 8(-2.8,-2.275) 9(2.8,-2.275) 10(2.8,-1.625) 11(2.8,-0.975) 12(2.8,-0.325) 13(2.8,0.325) 14(2.8,0.975) 15(2.8,1.625) 16(2.8,2.275)
  silkscreen extent -2.92,-2.55 1.7,3.12, body extent -2.25,-2.55 2.25,2.55, height 1.1
ONSC-SOD-123-2-425-04_V [mm] "SOD, 2-Leads, Body 2.69x1.6mm"
  rect 0.91x1.22 smd: 1(-1.635,0) 2(1.635,0)
  silkscreen extent -1.76,-0.8 0.78,1.28, body extent -1.35,-0.8 1.35,0.8, height 1.35
ONSC-SOD-523-2-502-01_V [mm] "SOD, 2-Leads, Body 1.2x0.8mm"
  rect 0.48x0.4 smd: 1(-0.66,0) 2(0.66,0)
  silkscreen extent -0.75,-0.4 0.07,0.65, body extent -0.6,-0.4 0.6,0.4, height 0.7
QFN50P400X400X100_HS-25N [mm] "QFN, 24-Leads, Body 4.00x4.00mm, Pitch 0.50mm, Thermal Pad 2.10x2.10mm, IPC Medium Density"
  oval 0.95x0.25 smd: 1(-1.875,1.25) 2(-1.875,0.75) 3(-1.875,0.25) 4(-1.875,-0.25) 5(-1.875,-0.75) 6(-1.875,-1.25) 13(1.875,-1.25) 14(1.875,-0.75) 15(1.875,-0.25) 16(1.875,0.25) 17(1.875,0.75) 18(1.875,1.25)
  oval 0.25x0.95 smd: 7(-1.25,-1.875) 8(-0.75,-1.875) 9(-0.25,-1.875) 10(0.25,-1.875) 11(0.75,-1.875) 12(1.25,-1.875) 19(1.25,1.875) 20(0.75,1.875) 21(0.25,1.875) 22(-0.25,1.875) 23(-0.75,1.875) 24(-1.25,1.875)
  rect 2.1x2.1 smd: 25(0,0)
  silkscreen extent -2.97,-2.2 2.2,2.2, body extent -2.05,-2.05 2.05,2.05, height 1
R0603B [mm] "Chip Resistor, 0603, 2-Leads, Body 1.58x0.85mm, IPC Medium Density"
  rrect25% 0.8x0.95 smd: 1(-0.65,0) 2(0.65,0)
  silkscreen extent -0.2,-0.7 0.2,0.7, body extent -0.82,-0.48 0.82,0.48, height 0.5
RESC1608X90X30ML15T20 [mm] "Chip Resistor, 2-Leads, Body 1.60x0.80mm, IPC Low Density"
  rect 0.95x1.05 smd: 1(-0.7,0) 2(0.7,0)
  body extent -0.88,-0.48 0.87,0.48, height 0.9
SISH615ADN-T1-GE3-Footprint-1 [mm]
  rect 0.35x0.5 smd paste+0 mask+0: 1(-0.937,-1.4) 2(-0.288,-1.4) 3(0.363,-1.4) 4(1.012,-1.4)
  round 0.025 smd mask+0: 5-6-7-8(0.038,0.51)
  Top Layer region: -1.187,-0.63 -1.187,-0.215 -1.568,-0.215 -1.568,0.215 -1.187,0.215 -1.187,1.35 -1.137,1.35 -1.137,1.65 -0.737,1.65 -0.737,1.35 -0.487,1.35 -0.487,1.65 -0.088,1.65 -0.088,1.35 0.163,1.35 0.163,1.65 0.563,1.65 0.563,1.35 0.813,1.35 0.813,1.65 1.212,1.65 1.212,1.35 1.262,1.35 1.262,0.215 1.643,0.215 1.643,-0.215 1.262,-0.215 1.262,-0.63
  silkscreen extent -1.51,-2.37 1.59,-1.01, body extent -1.67,-1.75 1.74,1.75, height 0.25
SOT-223_L [mm] "SOT223, 4-Leads, Body 6.5x3.5mm, Pitch 2.3mm, Lead Span 7mm, IPC High Density"
  rect 2.1x0.9 smd: 1(-2.85,2.3) 2(-2.85,0) 3(-2.85,-2.3)
  rect 2.1x3.2 smd: 4(2.85,0)
  silkscreen extent -2.97,-3.35 1.5,3.42, body extent -1.85,-3.35 1.85,3.35, height 1.8
TCAN1146DYYRQ1-Footprint-1 [mil]
  rect 38.5x12 smd paste+0 mask+0: 1(-60.75,59.07) 2(-60.75,39.38) 3(-60.75,19.69) 4(-60.75,0) 5(-60.75,-19.69) 6(-60.75,-39.38) 7(-60.75,-59.07) 8(60.75,-59.07) 9(60.75,-39.38) 10(60.75,-19.69) 11(60.75,0) 12(60.75,19.69) 13(60.75,39.38) 14(60.75,59.07)
  silkscreen extent -46,-90 100,90, body extent -66,-84 66,84, height 43
TSQFP50P900X900X160-48N [mm] "TSQFP, 48-Leads, Body 7.00x7.00mm, Pitch 0.50mm, IPC Medium Density"
  oval 1.45x0.3 smd: 1(-4.225,2.75) 2(-4.225,2.25) 3(-4.225,1.75) 4(-4.225,1.25) 5(-4.225,0.75) 6(-4.225,0.25) 7(-4.225,-0.25) 8(-4.225,-0.75) 9(-4.225,-1.25) 10(-4.225,-1.75) 11(-4.225,-2.25) 12(-4.225,-2.75) 25(4.225,-2.75) 26(4.225,-2.25) 27(4.225,-1.75) 28(4.225,-1.25) 29(4.225,-0.75) 30(4.225,-0.25) 31(4.225,0.25) 32(4.225,0.75) 33(4.225,1.25) 34(4.225,1.75) 35(4.225,2.25) 36(4.225,2.75)
  oval 0.3x1.45 smd: 13(-2.75,-4.225) 14(-2.25,-4.225) 15(-1.75,-4.225) 16(-1.25,-4.225) 17(-0.75,-4.225) 18(-0.25,-4.225) 19(0.25,-4.225) 20(0.75,-4.225) 21(1.25,-4.225) 22(1.75,-4.225) 23(2.25,-4.225) 24(2.75,-4.225) 37(2.75,4.225) 38(2.25,4.225) 39(1.75,4.225) 40(1.25,4.225) 41(0.75,4.225) 42(0.25,4.225) 43(-0.25,4.225) 44(-0.75,4.225) 45(-1.25,4.225) 46(-1.75,4.225) 47(-2.25,4.225) 48(-2.75,4.225)
  silkscreen extent -4.35,-3.1 3.1,3.57, body extent -3.5,-3.5 3.5,3.5, height 1.6
WE-HCI_1890 [mm] "SMT Flat Wire High Current Inductor, body 18.2x18.2mm"
  rect 6x6 smd: 1(0,6.65) 2(0,-6.65)
  silkscreen extent -9.35,-9.35 9.35,9.35, body extent -9.1,-9.15 9.1,9.15, height 8.9
WE-PD-L [mm] "SMD Inductor, 2-Leads, Body 12.0 x 12.0 mm"
  rect 2.9x5.4 smd: 1(-4.95,0) 2(4.95,0)
  silkscreen extent -6.25,-6.25 6.25,6.25, body extent -6,-6 6,6, height 5.98
WL-SBCD_0606 [mm] "SMT Bi-color Chip LED Diffuesed, body 1.5x1.6mm"
  rect 0.5x0.8 smd: 1(-0.45,0.8) 2(-0.45,-0.8) 3(0.45,-0.8) 4(0.45,0.8)
  silkscreen extent -0.07,1.48 0.08,1.62, body extent -0.75,-0.8 0.75,0.8, height 0.55